# Altium PCB PCB.PcbDoc
Units mm, origin at the board's own origin, x right, y up, seen from the top; angles counter-clockwise.
Board outline 80 x 50 mm, 4 copper layers (Top Layer, Layer 1, Layer 2, Bottom Layer), stack 1.586 mm thick; 136 components, 55 nets, 619 pads, 0 vias.
Unrouted connection lines stored in the file: 449.
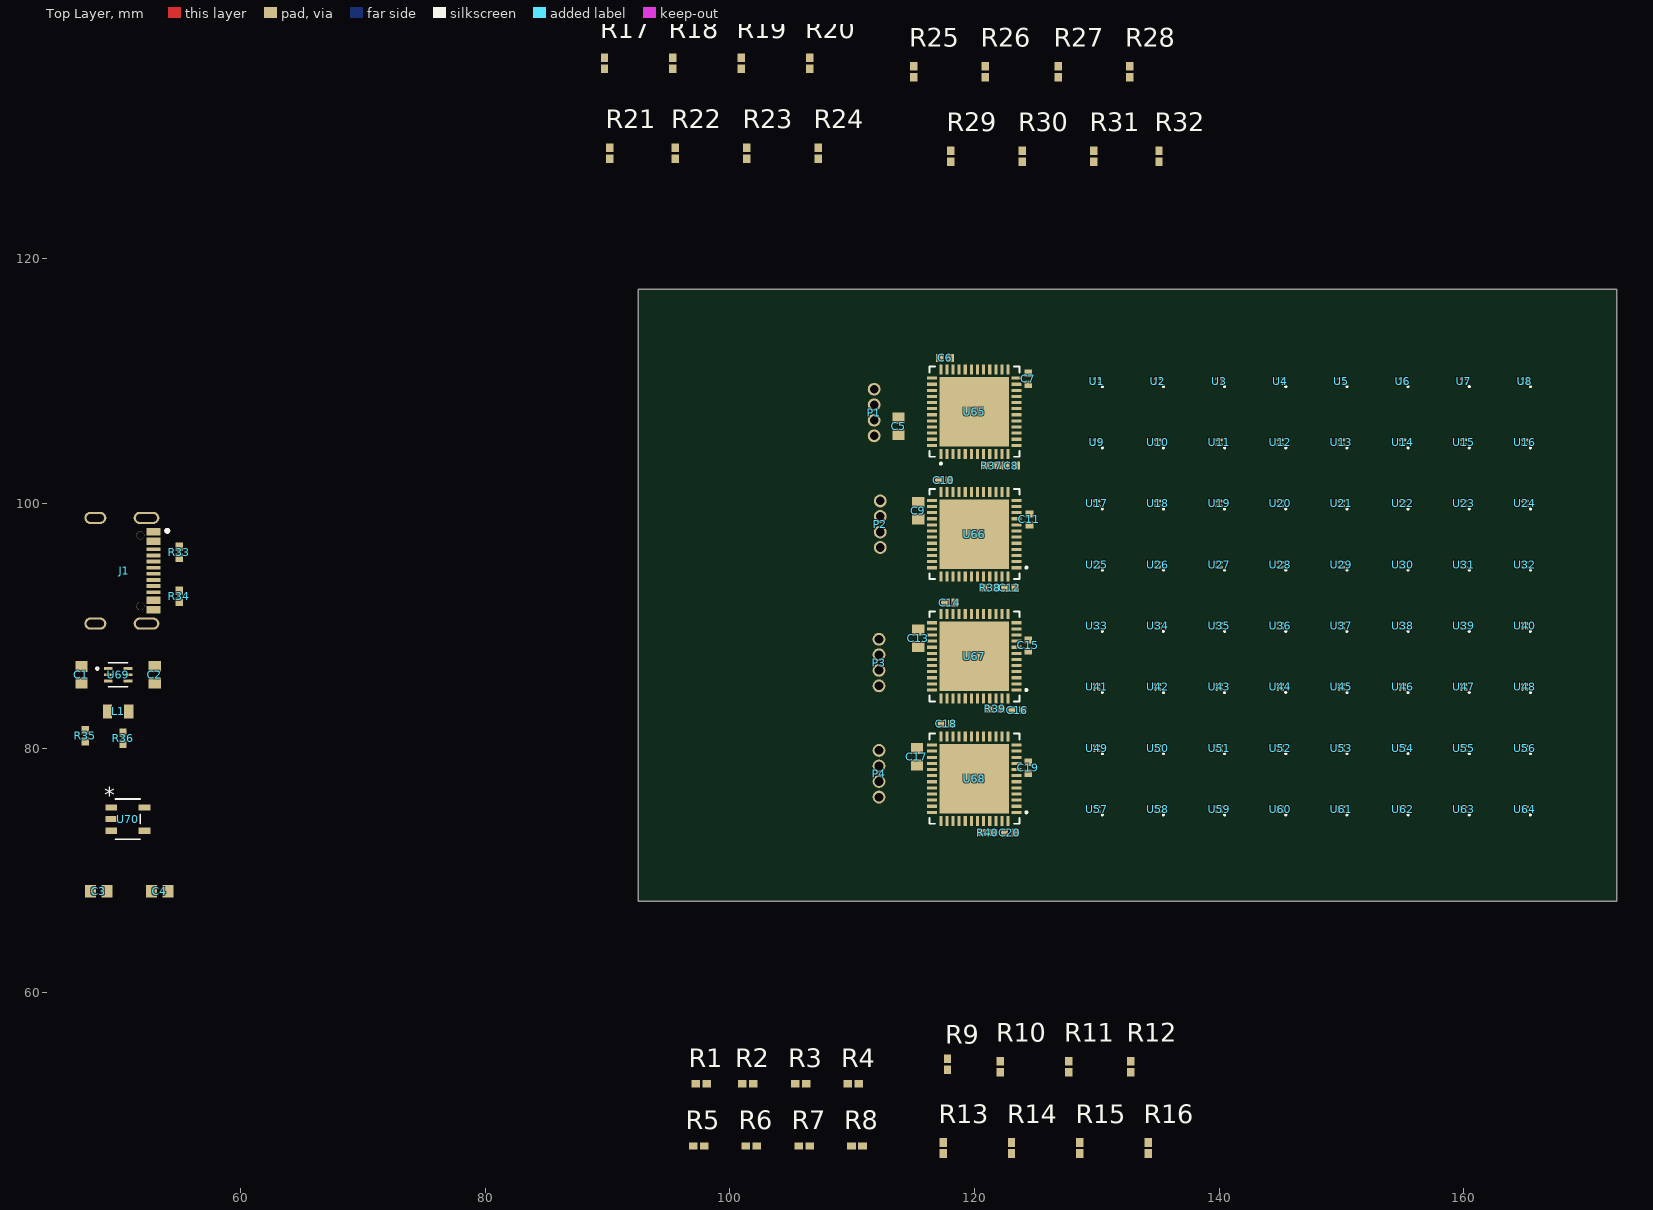
[diagram p0: Top Layer view]
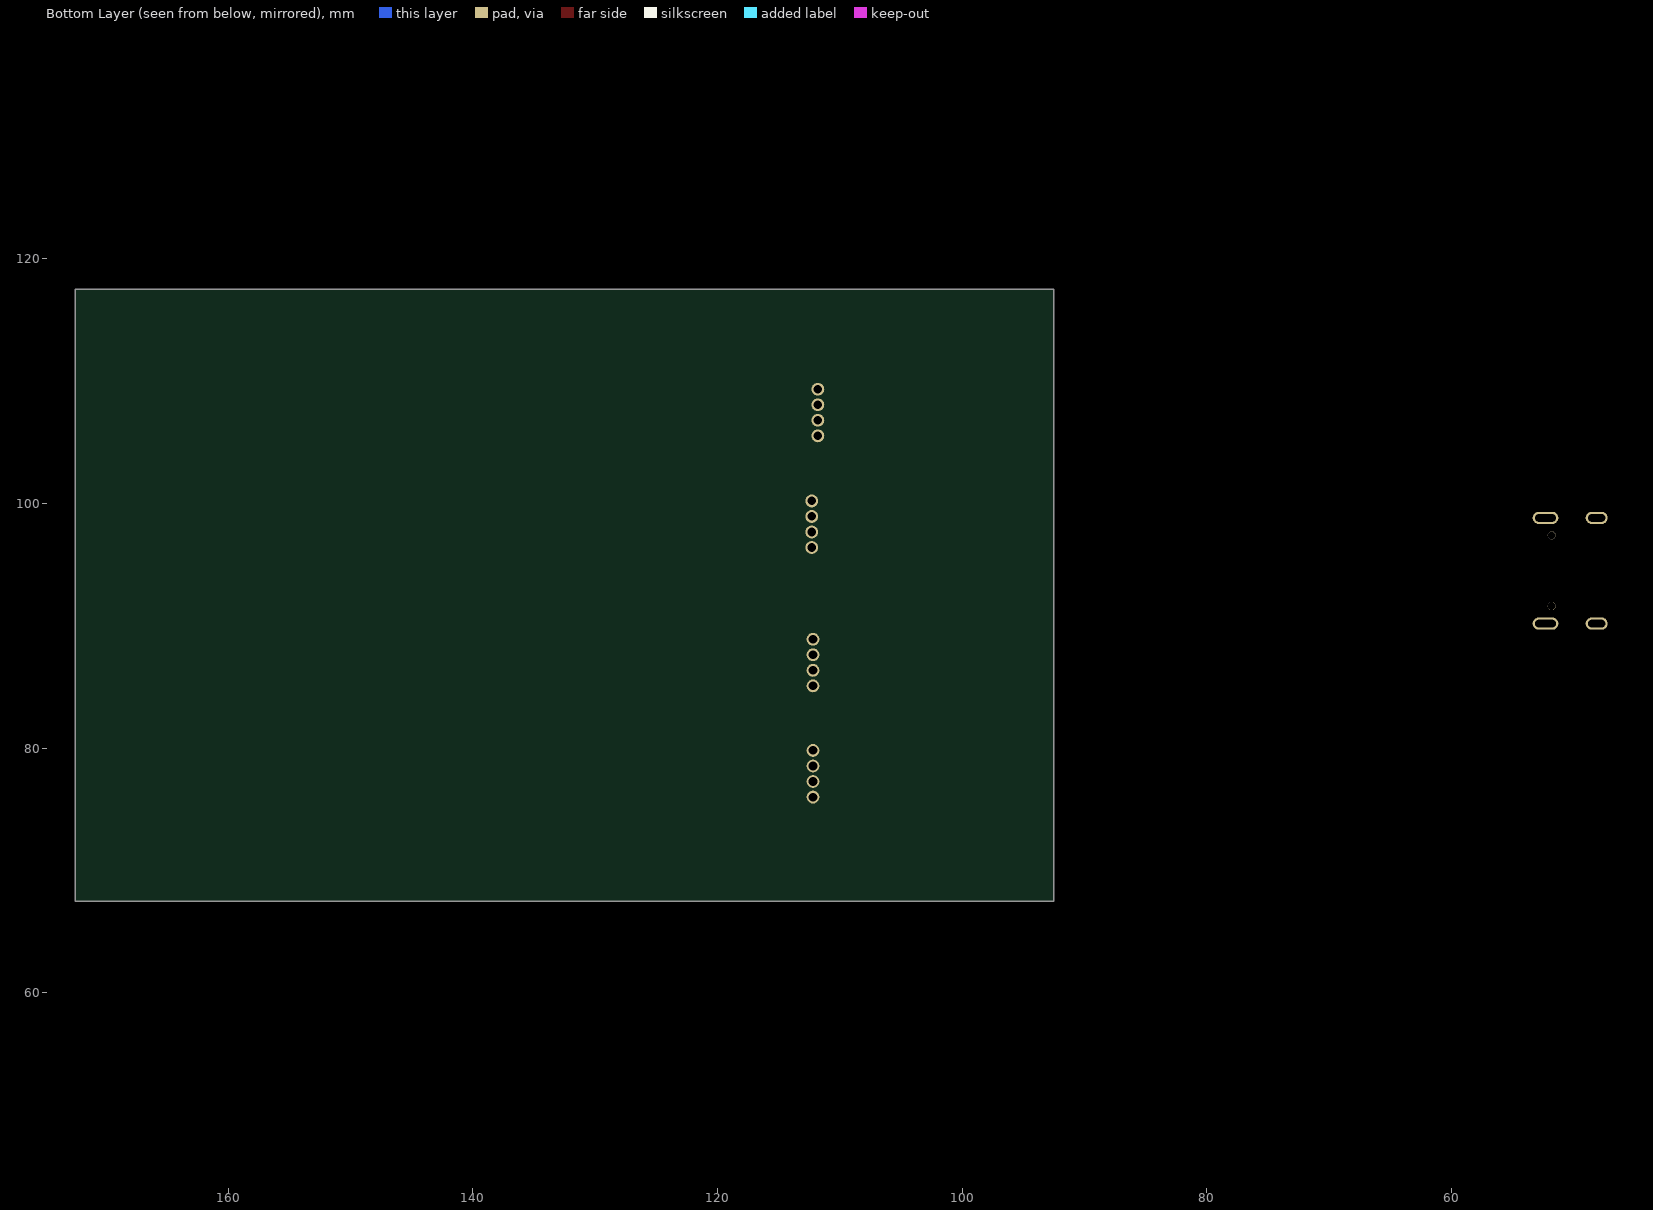
[diagram p1: Bottom Layer view, seen from below]

## Layer stack, top to bottom
Top Solder: solder mask 0.0102, Solder Resist, Dk 3.5
Top Layer: signal copper 0.035
Dielectric 2: prepreg 0.2104, PP-006, Dk 4.6
Layer 1: signal copper 0.0152
Dielectric 1: dielectric 1.065, FR-4, Dk 4.6
Layer 2: signal copper 0.0152
Dielectric 3: prepreg 0.2104, PP-006, Dk 4.6
Bottom Layer: signal copper 0.035
Bottom Solder: solder mask 0.0102, Solder Resist, Dk 3.5

## Board outline
92.5,67.5 92.5,117.5 172.5,117.5 172.5,67.5

## Design rules (kind name [scope] priority, off if disabled: settings)
Clearance [All] p1: gap=0.127 ignorepadtopadclearanceinfootprint=FALSE
PolygonConnect [All] p1: connectstyle=Relief reliefconductorwidth=0.254 reliefentries=4 polygonreliefangle="90 Angle" airgapwidth=0.254
RoutingVias [All] p1: holewidth=0.711 width=1.27 viastyle="Through Hole" minholewidth=0.711 minwidth=1.27 maxholewidth=0.711 maxwidth=1.27
SolderMaskExpansion [All] p1: expansion=0.102 istentingtop=FALSE
Width [All] p1: maxlimit=0.254 minlimit=0.254 preferedwidth=0.254
30 further rules are at their usual default settings.

## Components (designator, comment, footprint, x,y, rotation, side; value= is the part's Value field where it differs from the comment)
C1 "22u" CAP_0603 47,86 r270 top
C2 "4u7" CAP_0603 53,86 r270 top
C3 "1u" CAP_0603 48.4,68.3 r0 top
C4 "1u" CAP_0603 53.4,68.3 r0 top
C5 "4u7" CAP_0603 113.8,106.3 r90 top
C6 "100n" CAP_0402 117.6,111.9 r180 top
C7 "100n" CAP_0402 124.4,110.2 r90 top
C8 "100n" CAP_0402 123,103.1 r0 top
C9 "4u7" CAP_0603 115.4,99.4 r90 top
C10 "100n" CAP_0402 117.5,101.9 r180 top
C11 "100n" CAP_0402 124.5,98.7 r90 top
C12 "100n" CAP_0402 122.9,93.1 r0 top
C13 "4u7" CAP_0603 115.4,89 r90 top
C14 "100n" CAP_0402 118,91.9 r180 top
C15 "100n" CAP_0402 124.4,88.4 r90 top
C16 "100n" CAP_0402 123.5,83.1 r0 top
C17 "4u7" CAP_0603 115.3,79.3 r90 top
C18 "100n" CAP_0402 117.7,82 r180 top
C19 "100n" CAP_0402 124.4,78.4 r90 top
C20 "100n" CAP_0402 122.9,73.1 r0 top
J1 "USB4105-GF-A" FP-USB4105-GF-A-MFG 49.3,94.5 r270 top
L1 "1u" IND_0603 50,83 r0 top
P1 "PIN_1.27x4" PIN_1.27x4 111.8,107.435 r270 top
P2 "PIN_1.27x4" PIN_1.27x4 112.3,98.305 r270 top
P3 "PIN_1.27x4" PIN_1.27x4 112.2,86.995 r270 top
P4 "PIN_1.27x4" PIN_1.27x4 112.2,77.905 r270 top
R1 "10k" RES_0402_RF 97.664,52.56 r0 top
R2 "10k" RES_0402_RF 101.474,52.56 r0 top
R3 "10k" RES_0402_RF 105.792,52.56 r0 top
R4 "10k" RES_0402_RF 110.11,52.56 r0 top
R5 "10k" RES_0402_RF 97.447,47.473 r0 top
R6 "10k" RES_0402_RF 101.765,47.473 r0 top
R7 "10k" RES_0402_RF 106.083,47.473 r0 top
R8 "10k" RES_0402_RF 110.401,47.473 r0 top
R9 "10k" RES_0402_RF 117.8,54.15 r90 top
R10 "10k" RES_0402_RF 122.108,53.938 r90 top
R11 "10k" RES_0402_RF 127.696,53.938 r90 top
R12 "10k" RES_0402_RF 132.776,53.938 r90 top
R13 "10k" RES_0402_RF 117.442,47.311 r90 top
R14 "10k" RES_0402_RF 123.03,47.311 r90 top
R15 "10k" RES_0402_RF 128.618,47.311 r90 top
R16 "10k" RES_0402_RF 134.206,47.311 r90 top
R17 "10k" RES_0402_RF 89.76,135.998 r90 top
R18 "10k" RES_0402_RF 95.348,135.998 r90 top
R19 "10k" RES_0402_RF 100.936,135.998 r90 top
R20 "10k" RES_0402_RF 106.524,135.998 r90 top
R21 "10k" RES_0402_RF 90.2,128.625 r90 top
R22 "10k" RES_0402_RF 95.534,128.625 r90 top
R23 "10k" RES_0402_RF 101.376,128.625 r90 top
R24 "10k" RES_0402_RF 107.218,128.625 r90 top
R25 "10k" RES_0402_RF 115.031,135.298 r90 top
R26 "10k" RES_0402_RF 120.873,135.298 r90 top
R27 "10k" RES_0402_RF 126.842,135.298 r90 top
R28 "10k" RES_0402_RF 132.684,135.298 r90 top
R29 "10k" RES_0402_RF 118.075,128.398 r90 top
R30 "10k" RES_0402_RF 123.917,128.398 r90 top
R31 "10k" RES_0402_RF 129.759,128.398 r90 top
R32 "10k" RES_0402_RF 135.093,128.398 r90 top
R33 "5k1" RES_0402_RF 55,96 r270 top
R34 "5k1" RES_0402_RF 55,92.425 r90 top
R35 "200k" RES_0402_RF 47.3,81 r90 top
R36 "100k" RES_0402_RF 50.4,80.8 r90 top
R37 "10k" RES_0402_RF 121.4,103.1 r0 top
R38 "10k" RES_0402_RF 121.3,93.1 r0 top
R39 "10k" RES_0402_RF 121.7,83.2 r0 top
R40 "10k" RES_0402_RF 121.1,73.1 r0 top
U1 "MMC5603NJ" WLP4x2 130,110 r180 top
U2 "MMC5603NJ" WLP4x2 135,110 r180 top
U3 "MMC5603NJ" WLP4x2 140,110 r180 top
U4 "MMC5603NJ" WLP4x2 145,110 r180 top
U5 "MMC5603NJ" WLP4x2 150,110 r180 top
U6 "MMC5603NJ" WLP4x2 155,110 r180 top
U7 "MMC5603NJ" WLP4x2 160,110 r180 top
U8 "MMC5603NJ" WLP4x2 165,110 r180 top
U9 "MMC5603NJ" WLP4x2 130,105 r180 top
U10 "MMC5603NJ" WLP4x2 135,105 r180 top
U11 "MMC5603NJ" WLP4x2 140,105 r180 top
U12 "MMC5603NJ" WLP4x2 145,105 r180 top
U13 "MMC5603NJ" WLP4x2 150,105 r180 top
U14 "MMC5603NJ" WLP4x2 155,105 r180 top
U15 "MMC5603NJ" WLP4x2 160,105 r180 top
U16 "MMC5603NJ" WLP4x2 165,105 r180 top
U17 "MMC5603NJ" WLP4x2 130,100 r180 top
U18 "MMC5603NJ" WLP4x2 135,100 r180 top
U19 "MMC5603NJ" WLP4x2 140,100 r180 top
U20 "MMC5603NJ" WLP4x2 145,100 r180 top
U21 "MMC5603NJ" WLP4x2 150,100 r180 top
U22 "MMC5603NJ" WLP4x2 155,100 r180 top
U23 "MMC5603NJ" WLP4x2 160,100 r180 top
U24 "MMC5603NJ" WLP4x2 165,100 r180 top
U25 "MMC5603NJ" WLP4x2 130,95 r180 top
U26 "MMC5603NJ" WLP4x2 135,95 r180 top
U27 "MMC5603NJ" WLP4x2 140,95 r180 top
U28 "MMC5603NJ" WLP4x2 145,95 r180 top
U29 "MMC5603NJ" WLP4x2 150,95 r180 top
U30 "MMC5603NJ" WLP4x2 155,95 r180 top
U31 "MMC5603NJ" WLP4x2 160,95 r180 top
U32 "MMC5603NJ" WLP4x2 165,95 r180 top
U33 "MMC5603NJ" WLP4x2 130,90 r180 top
U34 "MMC5603NJ" WLP4x2 135,90 r180 top
U35 "MMC5603NJ" WLP4x2 140,90 r180 top
U36 "MMC5603NJ" WLP4x2 145,90 r180 top
U37 "MMC5603NJ" WLP4x2 150,90 r180 top
U38 "MMC5603NJ" WLP4x2 155,90 r180 top
U39 "MMC5603NJ" WLP4x2 160,90 r180 top
U40 "MMC5603NJ" WLP4x2 165,90 r180 top
U41 "MMC5603NJ" WLP4x2 130,85 r180 top
U42 "MMC5603NJ" WLP4x2 135,85 r180 top
U43 "MMC5603NJ" WLP4x2 140,85 r180 top
U44 "MMC5603NJ" WLP4x2 145,85 r180 top
U45 "MMC5603NJ" WLP4x2 150,85 r180 top
U46 "MMC5603NJ" WLP4x2 155,85 r180 top
U47 "MMC5603NJ" WLP4x2 160,85 r180 top
U48 "MMC5603NJ" WLP4x2 165,85 r180 top
U49 "MMC5603NJ" WLP4x2 130,80 r180 top
U50 "MMC5603NJ" WLP4x2 135,80 r180 top
U51 "MMC5603NJ" WLP4x2 140,80 r180 top
U52 "MMC5603NJ" WLP4x2 145,80 r180 top
U53 "MMC5603NJ" WLP4x2 150,80 r180 top
U54 "MMC5603NJ" WLP4x2 155,80 r180 top
U55 "MMC5603NJ" WLP4x2 160,80 r180 top
U56 "MMC5603NJ" WLP4x2 165,80 r180 top
U57 "MMC5603NJ" WLP4x2 130,75 r180 top
U58 "MMC5603NJ" WLP4x2 135,75 r180 top
U59 "MMC5603NJ" WLP4x2 140,75 r180 top
U60 "MMC5603NJ" WLP4x2 145,75 r180 top
U61 "MMC5603NJ" WLP4x2 150,75 r180 top
U62 "MMC5603NJ" WLP4x2 155,75 r180 top
U63 "MMC5603NJ" WLP4x2 160,75 r180 top
U64 "MMC5603NJ" WLP4x2 165,75 r180 top
U65 "STM32L452CCU6" UFQFPN48-7X7MM_STM 120,107.5 r90 top
U66 "STM32L452CCU6" UFQFPN48-7X7MM_STM 120,97.5 r180 top
U67 "STM32L452CCU6" UFQFPN48-7X7MM_STM 120,87.5 r180 top
U68 "STM32L452CCU6" UFQFPN48-7X7MM_STM 120,77.5 r180 top
U69 "TPS62A02DRLR" SOT-5X3-6_DRL_TEX 50,86 r0 top
U70 "TPS7A0212PDBVR" SOT23_DBV_TEX 50.8,74.2 r0 top

## Footprints (in the part's own frame and the unit in brackets; to place one, negate y for a bottom-side part, rotate by r counter-clockwise, add the part's x,y. Pads: shape width x height; smd on the part's side, far side on the other; paste and mask are expansions set on the pad)
CAP_0402 [mm] "Chip Capacitor, 2-Leads, Body 1.02x0.51mm, IPC Medium Density"
  rect 0.6x0.64 smd: 1(-0.44,0) 2(0.44,0)
  body extent -0.5,-0.26 0.5,0.26, height 0.52
CAP_0603 [mm] "Chip Capacitor, 2-Leads, Body 1.60x0.80mm, IPC Medium Density"
  rect 0.9x1 smd: 1(-0.675,0) 2(0.675,0)
  body extent -0.8,-0.41 0.8,0.41, height 0.82
FP-USB4105-GF-A-MFG [mm]
  rrect100% 1x2.1 hole 1.7 slot 0.6 at 0 deg paste-1000 mask+0: 1(-4.32,3.015) 2(4.32,3.015)
  rrect100% 1x1.8 hole 1.4 slot 0.6 at 0 deg paste-1000 mask+0: 3(-4.32,-1.165) 4(4.32,-1.165)
  rect 0.6x1.15 smd paste+0 mask+0: A1-B12(-3.2,3.59) A4-B9(-2.4,3.59) B1-A12(3.2,3.59) B4-A9(2.4,3.59)
  rect 0.3x1.15 smd paste+0 mask+0: A5(-1.25,3.59) A6(-0.25,3.59) A7(0.25,3.59) A8(1.25,3.59) B5(1.75,3.59) B6(0.75,3.59) B7(-0.75,3.59) B8(-1.75,3.59)
  round 0.65 hole 0.65 unplated paste-1000 mask+0: ""(-2.89,2.515) ""(2.89,2.515)
  silkscreen extent -3.39,4.59 -3.14,4.84, body extent -4.96,-3.94 4.96,4.27, height 0.25
IND_0603 [mm] "Chip Inductor, 2-Leads, Body 1.65x0.99mm, IPC Medium Density"
  rect 0.76x1.13 smd: 1(-0.875,0) 2(0.875,0)
  body extent -0.84,-0.58 0.83,0.58, height 1
PIN_1.27x4 [mm] "Pin Header, pitch 1.27 mm, THT"
  round 1.05 hole 0.7: 1(-1.905,0) 2(-0.635,0) 3(0.635,0) 4(1.905,0)
RES_0402_RF [mm] "Chip Resistor, 2-Leads, Body 1.0x0.5mm, IPC High Density"
  rect 0.7x0.6 smd: 1(-0.45,0) 2(0.45,0)
  body extent -0.5,-0.25 0.5,0.25, height 0.35
SOT23_DBV_TEX [mil]
  rect 38.5x20 smd paste+0 mask+0: 1(-53.75,37.4) 2(-53.75,0) 3(-53.75,-37.4) 4(53.75,-37.4) 5(53.75,37.4)
  silkscreen extent -40,-65 40,65, body extent -59,-60 59,60, height 57
SOT-5X3-6_DRL_TEX [mil]
  rect 28x9 smd paste+0 mask+0: 1(-31.5,19.69) 2(-31.5,0) 3(-31.5,-19.69) 4(31.5,-19.69) 5(31.5,0) 6(31.5,19.69)
  silkscreen extent -71,-38 30,38, body extent -34,-34 34,34, height 24
UFQFPN48-7X7MM_STM [mil]
  rect 32x10 smd paste+0 mask+0: 1(-136,108.27) 2(-136,88.58) 3(-136,68.9) 4(-136,49.21) 5(-136,29.53) 6(-136,9.84) 7(-136,-9.84) 8(-136,-29.53) 9(-136,-49.21) 10(-136,-68.9) 11(-136,-88.58) 12(-136,-108.27) 25(136,-108.27) 26(136,-88.58) 27(136,-68.9) 28(136,-49.21) 29(136,-29.53) 30(136,-9.84) 31(136,9.84) 32(136,29.53) 33(136,49.21) 34(136,68.9) 35(136,88.58) 36(136,108.27)
  rect 10x32 smd paste+0 mask+0: 13(-108.27,-136) 14(-88.58,-136) 15(-68.9,-136) 16(-49.21,-136) 17(-29.53,-136) 18(-9.84,-136) 19(9.84,-136) 20(29.53,-136) 21(49.21,-136) 22(68.9,-136) 23(88.58,-136) 24(108.27,-136) 37(108.27,136) 38(88.58,136) 39(68.9,136) 40(49.21,136) 41(29.53,136) 42(9.84,136) 43(-9.84,136) 44(-29.53,136) 45(-49.21,136) 46(-68.9,136) 47(-88.58,136) 48(-108.27,136)
  rect 224x224 smd paste-111.5 mask+0: 49(0,0)
  silkscreen extent -170,-145 145,145, body extent -140,-140 140,140, height 24
WLP4x2 [mm]
  round 0.23 smd paste+0 mask+0.076: A1(-0.2,0.2) A2(0.2,0.2) B1(-0.2,-0.2) B2(0.2,-0.2)
  silkscreen extent -0.5,0.4 -0.4,0.5, body extent -0.41,-0.41 0.41,0.41, height 0.54

## Part data
C1 C2 C3 C4 C5 C9 C13 C17: library part CAP_0603, "Capacitor SMD 0603", Voltage=50V
  C1: Capacitance=22u
  C2 C5 C9 C13 C17: Capacitance=4u7
  C3 C4: Capacitance=1u
C6 C7 C8 C10 C11 C12 C14 C15 C16 C18 C19 C20: library part CAP_0402, "Capacitor SMD 0402", Voltage=50V, Capacitance=100n
J1: library part CMP-245163-000001-1, "CONN RCPT USB2.0 TYPEC 5A", Current Rating=5/6.25/1.25/0.25A, Manufacturer=GCT, Package=0, Temperature="-40°C to +85°C", Temperature Range High=+85°C, Temperature Range Low=-40°C, Voltage Rating=20V, Automotive=No, Category=Conn, ComponentLink2Description=Datasheet, ComponentLink2URL=https://gct.co/files/drawings/usb4105.pdf, Conn Orientation="Right Angle", Contact Material=Gold,Nickel, Device Class L1=Connectors, Device Class L2="USB Connectors", Device Class L3=unset, Digikey Description="CONN RCPT USB2.0 TYPEC 5A", Height=3.46mm, Is Female=yes, Lead Free=Yes, Manufacturer Part Number=USB4105-GF-A, Number Of Contacts=16, Octopart=https://octopart.com/usb4105-gf-a-gct-106627878, RoHS=TRUE, Usb Standard="USB 2.0"
L1: library part IND_0603, "Inductor SMD 0603", Inductance=1u
R1 R2 R3 R4 R5 R6 R7 R8 R9 R10 R11 R12 R13 R14 R15 R16 R17 R18 R19 R20 R21 R22 R23 R24 R25 R26 R27 R28 R29 R30 R31 R32 R33 R34 R35 R36 R37 R38 R39 R40: library part RES_0402, "Resistor SMD 0402"
  R1 R2 R3 R4 R5 R6 R7 R8 R9 R10 R11 R12 R13 R14 R15 R16 R17 R18 R19 R20 R21 R22 R23 R24 R25 R26 R27 R28 R29 R30 R31 R32 R37 R38 R39 R40: Resistance=10k
  R33 R34: Resistance=5k1
  R35: Resistance=200k
  R36: Resistance=100k
U1 U2 U3 U4 U5 U6 U7 U8 U9 U10 U11 U12 U13 U14 U15 U16 U17 U18 U19 U20 U21 U22 U23 U24 U25 U26 U27 U28 U29 U30 U31 U32 U33 U34 U35 U36 U37 U38 U39 U40 U41 U42 U43 U44 U45 U46 U47 U48 U49 U50 U51 U52 U53 U54 U55 U56 U57 U58 U59 U60 U61 U62 U63 U64: "3-AXIS Amr Magnetic Sensor", Manufacturer=Memsic, Supplier Part Number 1=1267-MMC5603NJCT-ND, Manufacturer Part Number=MMC5603NJ, Pricing 1="1=1.12000, 5=1.06600, 10=0.92800, 25=0.81520, 50=0.67720, 100=0.57680, 500=0.50160, 1000=0.43890, 5000=0.38874 (USD)", RoHS=Yes, Stock 1=9156, Supplier 1=Digi-Key
U65 U66 U67 U68: "No Description Available", Mfr_Name=STMicroelectronics, Copyright="Copyright (C) 2023 Ultra Librarian. All rights reserved.", Manufacturer_Part_Number=STM32L452CCU6, RefDes=RefDes, Type=DEV
U69 U70: "No Description Available", Mfr_Name="Texas Instruments", Copyright="Copyright (C) 2023 Ultra Librarian. All rights reserved.", RefDes=RefDes, Type=DEV
  U69: Manufacturer_Part_Number=TPS62A02DRLR
  U70: Manufacturer_Part_Number=TPS7A0212PDBVR

## Nets (pads, with @x,y where several pads share a name; then routed paths per layer and width w, separated by ;. In a path a pad name is that pad's centre, name@x,y a point inside that pad or via, vN(x,y) a via of type N, cw(c..) or ccw(c..) an arc to the next point about the centre after c; other vN are vias at no path point)
+5: C1.2 C3.2 J1.A4-B9 J1.B4-A9 U69.3 U69.4 U70.1 U70.3
GND: C1.1 C2.1 C3.1 C4.1 C5.1 C6.1 C7.1 C8.1 C9.1 C10.1 C11.1 C12.1 C13.1 C14.1 C15.1 C16.1 C17.1 C18.1 C19.1 C20.1 J1.1 J1.2 J1.3 J1.4 J1.A1-B12 J1.B1-A12 P1.4 P2.4 P3.4 P4.4 R33.1 R34.1 R36.2 R37.2 R38.2 R39.2 R40.2 U1.A1 U2.A1 U3.A1 U4.A1 U5.A1 U6.A1 U7.A1 U8.A1 U9.A1 U10.A1 U11.A1 U12.A1 U13.A1 U14.A1 U15.A1 U16.A1 U17.A1 U18.A1 U19.A1 U20.A1 U21.A1 U22.A1 U23.A1 U24.A1 U25.A1 U26.A1 U27.A1 U28.A1 U29.A1 U30.A1 U31.A1 U32.A1 U33.A1 U34.A1 U35.A1 U36.A1 U37.A1 U38.A1 U39.A1 U40.A1 U41.A1 U42.A1 U43.A1 U44.A1 U45.A1 U46.A1 U47.A1 U48.A1 U49.A1 U50.A1 U51.A1 U52.A1 U53.A1 U54.A1 U55.A1 U56.A1 U57.A1 U58.A1 U59.A1 U60.A1 U61.A1 U62.A1 U63.A1 U64.A1 U65.8 U65.23 U65.35 U65.47 U65.49 U66.8 U66.23 U66.35 U66.47 U66.49 U67.8 U67.23 U67.35 U67.47 U67.49 U68.8 U68.23 U68.35 U68.47 U68.49 U69.1 U70.2
I2C1_SCL: R1.1 U1.A2 U2.A2 U3.A2 U4.A2 U65.30
I2C1_SDA: R2.1 U1.B2 U2.B2 U3.B2 U4.B2 U65.31
I2C2_SCL: R3.1 U5.A2 U6.A2 U7.A2 U8.A2 U65.21
I2C2_SDA: R4.1 U5.B2 U6.B2 U7.B2 U8.B2 U65.22
I2C3_SCL: R5.1 U9.A2 U10.A2 U11.A2 U12.A2 U65.17
I2C3_SDA: R6.1 U9.B2 U10.B2 U11.B2 U12.B2 U65.40
I2C4_SCL: R7.1 U13.A2 U14.A2 U15.A2 U16.A2 U65.42
I2C4_SDA: R8.1 U13.B2 U14.B2 U15.B2 U16.B2 U65.43
I2C5_SCL: R9.1 U17.A2 U18.A2 U19.A2 U20.A2 U66.30
I2C5_SDA: R10.1 U17.B2 U18.B2 U19.B2 U20.B2 U66.31
I2C6_SCL: R11.1 U21.A2 U22.A2 U23.A2 U24.A2 U66.21
I2C6_SDA: R12.1 U21.B2 U22.B2 U23.B2 U24.B2 U66.22
I2C7_SCL: R13.1 U25.A2 U26.A2 U27.A2 U28.A2 U66.17
I2C7_SDA: R14.1 U25.B2 U26.B2 U27.B2 U28.B2 U66.40
I2C8_SCL: R15.1 U29.A2 U30.A2 U31.A2 U32.A2 U66.42
I2C8_SDA: R16.1 U29.B2 U30.B2 U31.B2 U32.B2 U66.43
I2C9_SCL: R17.1 U33.A2 U34.A2 U35.A2 U36.A2 U67.30
I2C9_SDA: R18.1 U33.B2 U34.B2 U35.B2 U36.B2 U67.31
I2C10_SCL: R19.1 U37.A2 U38.A2 U39.A2 U40.A2 U67.21
I2C10_SDA: R20.1 U37.B2 U38.B2 U39.B2 U40.B2 U67.22
I2C11_SCL: R21.1 U41.A2 U42.A2 U43.A2 U44.A2 U67.17
I2C11_SDA: R22.1 U41.B2 U42.B2 U43.B2 U44.B2 U67.40
I2C12_SCL: R23.1 U45.A2 U46.A2 U47.A2 U48.A2 U67.42
I2C12_SDA: R24.1 U45.B2 U46.B2 U47.B2 U48.B2 U67.43
I2C13_SCL: R25.1 U49.A2 U50.A2 U51.A2 U52.A2 U68.30
I2C13_SDA: R26.1 U49.B2 U50.B2 U51.B2 U52.B2 U68.31
I2C14_SCL: R27.1 U53.A2 U54.A2 U55.A2 U56.A2 U68.21
I2C14_SDA: R28.1 U53.B2 U54.B2 U55.B2 U56.B2 U68.22
I2C15_SCL: R29.1 U57.A2 U58.A2 U59.A2 U60.A2 U68.17
I2C15_SDA: R30.1 U57.B2 U58.B2 U59.B2 U60.B2 U68.40
I2C16_SCL: R31.1 U61.A2 U62.A2 U63.A2 U64.A2 U68.42
I2C16_SDA: R32.1 U61.B2 U62.B2 U63.B2 U64.B2 U68.43
NetJ1_A5: J1.A5 R33.2
NetJ1_B5: J1.B5 R34.2
NetL1_1: L1.1 U69.2
NetR35_2: R35.2 R36.1 U69.5
NetR37_1: R37.1 U65.44
NetR38_1: R38.1 U66.44
NetR39_1: R39.1 U67.44
NetR40_1: R40.1 U68.44
RESET: U65.7 U66.7 U67.7 U68.7
SWCLK1: P1.3 U65.37
SWCLK2: P2.3 U66.37
SWCLK3: P3.3 U67.37
SWCLK4: P4.3 U68.37
SWDIO1: P1.2 U65.34
SWDIO2: P2.2 U66.34
SWDIO3: P3.2 U67.34
SWDIO4: P4.2 U68.34
USB_DM: J1.A7 J1.B7 U65.32
USB_Dp: J1.A6 J1.B6 U65.33
VCC1V8: C2.2 C5.2 C6.2 C7.2 C8.2 C9.2 C10.2 C11.2 C12.2 C13.2 C14.2 C15.2 C16.2 C17.2 C18.2 C19.2 C20.2 L1.2 P1.1 P2.1 P3.1 P4.1 R1.2 R2.2 R3.2 R4.2 R5.2 R6.2 R7.2 R8.2 R9.2 R10.2 R11.2 R12.2 R13.2 R14.2 R15.2 R16.2 R17.2 R18.2 R19.2 R20.2 R21.2 R22.2 R23.2 R24.2 R25.2 R26.2 R27.2 R28.2 R29.2 R30.2 R31.2 R32.2 R35.1 U1.B1 U2.B1 U3.B1 U4.B1 U5.B1 U6.B1 U7.B1 U8.B1 U9.B1 U10.B1 U11.B1 U12.B1 U13.B1 U14.B1 U15.B1 U16.B1 U17.B1 U18.B1 U19.B1 U20.B1 U21.B1 U22.B1 U23.B1 U24.B1 U25.B1 U26.B1 U27.B1 U28.B1 U29.B1 U30.B1 U31.B1 U32.B1 U33.B1 U34.B1 U35.B1 U36.B1 U37.B1 U38.B1 U39.B1 U40.B1 U41.B1 U42.B1 U43.B1 U44.B1 U45.B1 U46.B1 U47.B1 U48.B1 U49.B1 U50.B1 U51.B1 U52.B1 U53.B1 U54.B1 U55.B1 U56.B1 U57.B1 U58.B1 U59.B1 U60.B1 U61.B1 U62.B1 U63.B1 U64.B1 U65.1 U65.9 U65.24 U65.48 U66.1 U66.9 U66.24 U66.48 U67.1 U67.9 U67.24 U67.48 U68.1 U68.9 U68.24 U68.48
VCC3V3: C4.2 U65.36 U70.5
pads on no net: J1. J1.A8 J1.B8 U65.2 U65.3 U65.4 U65.5 U65.6 U65.10 U65.11 U65.12 U65.13 U65.14 U65.15 U65.16 U65.18 U65.19 U65.20 U65.25 U65.26 U65.27 U65.28 U65.29 U65.38 U65.39 U65.41 U65.45 U65.46 U66.2 U66.3 U66.4 U66.5 U66.6 U66.10 U66.11 U66.12 U66.13 U66.14 U66.15 U66.16 U66.18 U66.19 U66.20 U66.25 U66.26 U66.27 U66.28 U66.29 U66.32 U66.33 U66.36 U66.38 U66.39 U66.41 U66.45 U66.46 U67.2 U67.3 U67.4 U67.5 U67.6 U67.10 U67.11 U67.12 U67.13 U67.14 U67.15 U67.16 U67.18 U67.19 U67.20 U67.25 U67.26 U67.27 U67.28 U67.29 U67.32 U67.33 U67.36 U67.38 U67.39 U67.41 U67.45 U67.46 U68.2 U68.3 U68.4 U68.5 U68.6 U68.10 U68.11 U68.12 U68.13 U68.14 U68.15 U68.16 U68.18 U68.19 U68.20 U68.25 U68.26 U68.27 U68.28 U68.29 U68.32 U68.33 U68.36 U68.38 U68.39 U68.41 U68.45 U68.46 U69.6 U70.4

## Text inside footprints (layer, text, board x,y; h text height)
U65: Mechanical 13 "*" at 117.635,104.135 h1.27 r90
U66: Mechanical 13 "*" at 123.365,95.135 h1.27 r180
U67: Mechanical 13 "*" at 123.365,85.135 h1.27 r180
U68: Mechanical 13 "*" at 123.365,75.135 h1.27 r180
U70: Top Overlay "*" at 48.863,75.531 h1.27; Mechanical 13 "*" at 49.86,74.439 h1.27